# Altium PCB barun module.pcbdoc
Units mil, origin at the board's own origin, x right, y up, seen from the top; angles counter-clockwise.
Board outline 3000 x 2000 mil, 2 copper layers (Top Layer, Bottom Layer); 29 components, 41 nets, 142 pads, 109 vias.
Unrouted connection lines stored in the file: 5.
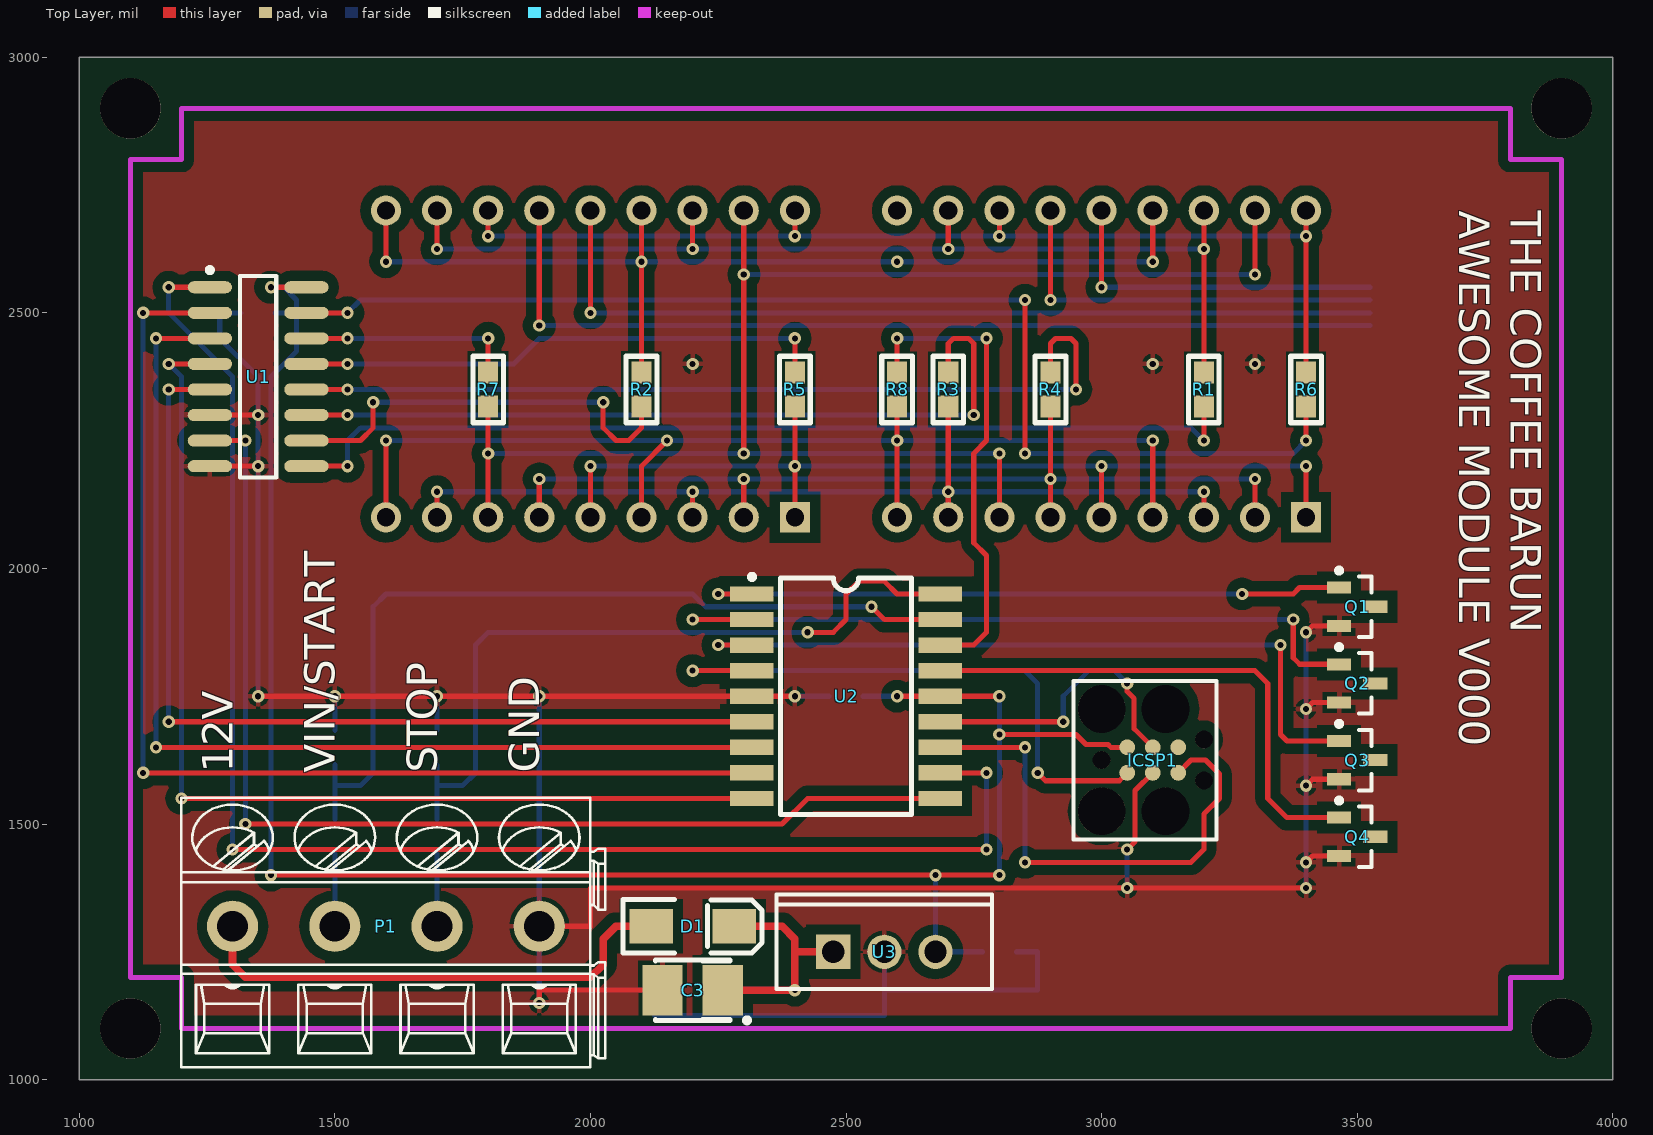
[diagram p0: Top Layer view]
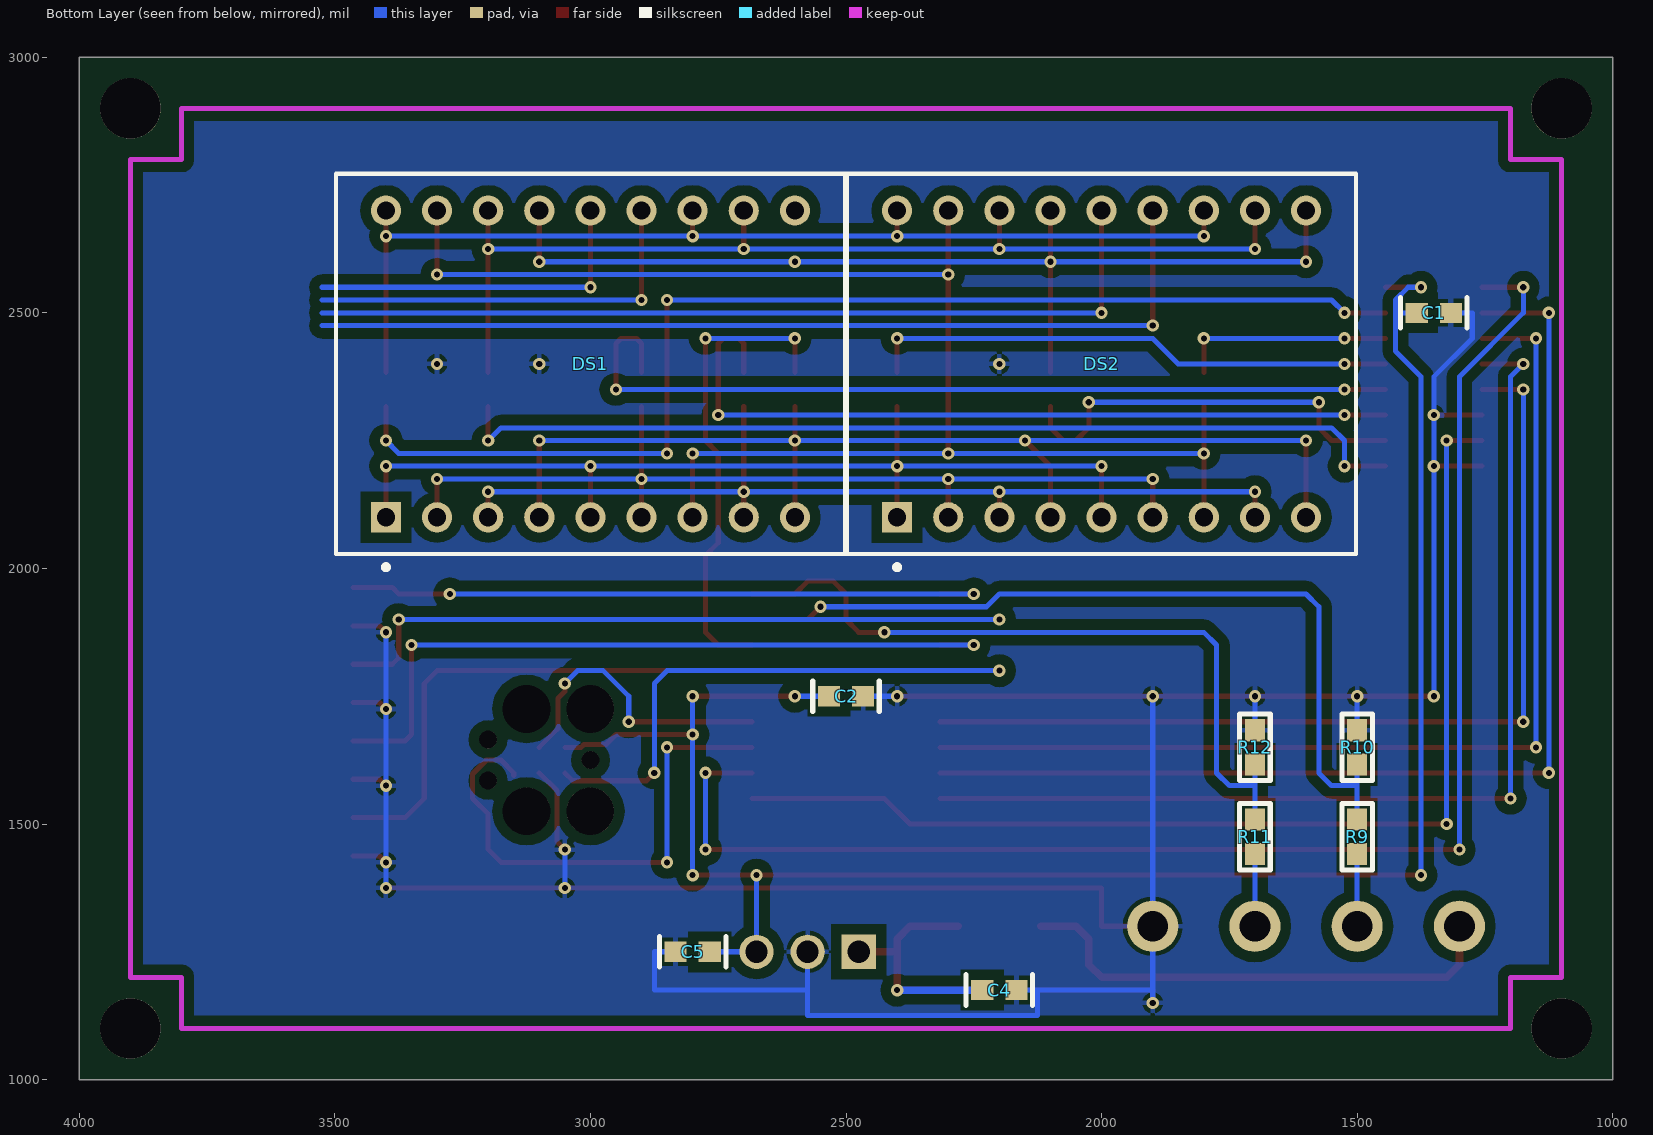
[diagram p1: Bottom Layer view, seen from below]

## Layer stack, top to bottom
Top Layer: signal copper 1.4
Dielectric: dielectric 12.6, FR-4, Dk 4.8
Bottom Layer: signal copper 1.4

## Board outline
1000,1000 1000,3000 4000,3000 4000,1000

## Design rules (kind name [scope] priority, off if disabled: settings)
Clearance Poly_GND [inPolygon vs not innet (gnd)] p1: gap=20
Clearance [All] p2: gap=8
PolygonConnect [All] p1: connectstyle=Relief reliefconductorwidth=10 reliefentries=4 polygonreliefangle="90 Angle"
RoutingVias [All] p1: holewidth=28 width=50 viastyle="Through Hole" minholewidth=12 minwidth=24 maxholewidth=28 maxwidth=50
SilkscreenOverComponentPads [All] p1: minsilkscreentomaskgap=10
SolderMaskExpansion [All] p1: expansion=4
Width [All] p1: maxlimit=150 minlimit=8 preferedwidth=10
27 further rules are at their usual default settings.

## Classes and differential pairs
component class "Barun Module": P1 R9 R10 R11 R12 U?
component class U_PIC16F627: C2 ICSP1 U2
component class U_PSU: C3 C4 C5 D1 U3
component class "U_7 Segment Display": C1 DS1 DS2 Q1 Q2 Q3 Q4 R1 R2 R3 R4 R5 R6 R7 R8 U1

## Components (designator, comment, footprint, x,y, rotation, side; value= is the part's Value field where it differs from the comment)
C1 "100nF" "CAP (3D) - 0603" 1350,2500 r0 bottom
C2 "Cap" "CAP (3D) - 0603" 2500,1750 r180 bottom
C3 "10uF" "TAG B CASE" 2200,1175 r180 top
C4 "100nF" "CAP (3D) - 0603" 2200,1175 r0 bottom
C5 "100nF" "CAP (3D) - 0603" 2800,1250 r180 bottom
D1 "S1M" DO-214AC 2200,1300 r0 top
DS1 "DC56-51PBWA/A" "K-18 (3D)" 3000,2400 r180 bottom
DS2 "DC56-51PBWA/A" "K-18 (3D)" 2000,2400 r180 bottom
ICSP1 "TAG CONNECT" "ICSP - TAG CONNECT" 3000,1625 r0 top
P1 "Header 4" "4 x 5.08mm" 1600,1300 r0 top
Q1 "MMUN2211LT1" SOT23-3L 3500,1925 r0 top
Q2 "MMUN2211LT1" SOT23-3L 3500,1775 r0 top
Q3 "MMUN2211LT1" SOT23-3L 3500,1625 r0 top
Q4 "MMUN2211LT1" SOT23-3L 3500,1475 r0 top
R1 "1k" "RES (3D) - 0603" 3200,2350 r270 top
R2 "1k" "RES (3D) - 0603" 2100,2350 r270 top
R3 "1k" "RES (3D) - 0603" 2700,2350 r90 top
R4 "1k" "RES (3D) - 0603" 2900,2350 r90 top
R5 "1k" "RES (3D) - 0603" 2400,2350 r90 top
R6 "1k" "RES (3D) - 0603" 3400,2350 r270 top
R7 "1k" "RES (3D) - 0603" 1800,2350 r90 top
R8 "1k" "RES (3D) - 0603" 2600,2350 r90 top
R9 "10k" "RES (3D) - 0603" 1500,1475 r270 bottom
R10 "10k" "RES (3D) - 0603" 1500,1650 r90 bottom
R11 "10k" "RES (3D) - 0603" 1700,1475 r270 bottom
R12 "10k" "RES (3D) - 0603" 1700,1650 r90 bottom
U1 "MC14543BD" 751B-05_N 1350,2375 r0 top
U2 "PIC16F627-04I/P" SOIC-18 2500,1750 r270 top
U3 "LM7805ACT" TO-220 2575,1250 r0 top

## Footprints (in the part's own frame and the unit in brackets; to place one, negate y for a bottom-side part, rotate by r counter-clockwise, add the part's x,y. Pads: shape width x height; smd on the part's side, far side on the other; paste and mask are expansions set on the pad)
"4 x 5.08mm" [mil] "Phoenix Contact 1733596"
  round 100 hole 60: 1(-300,0) 2(-100,0) 3(100,0) 4(300,0)
  silkscreen extent -400,-276 429,252, body extent -400,-276 429,252, height 602
751B-05_N [mm] "SOIC, 16-Leads, Body 9.9x3.9mm, Pitch 1.27mm, IPC Medium Density"
  oval 2.2x0.6 smd: 1(-2.4,4.445) 2(-2.4,3.175) 3(-2.4,1.905) 4(-2.4,0.635) 5(-2.4,-0.635) 6(-2.4,-1.905) 7(-2.4,-3.175) 8(-2.4,-4.445) 9(2.4,-4.445) 10(2.4,-3.175) 11(2.4,-1.905) 12(2.4,-0.635) 13(2.4,0.635) 14(2.4,1.905) 15(2.4,3.175) 16(2.4,4.445)
  silkscreen extent -2.52,-5 0.9,5.42, body extent -1.95,-4.95 1.95,4.95, height 1.75
"CAP (3D) - 0603" [mm]
  rect 1.1x1 smd: 1(0.85,0) 2(-0.85,0)
  silkscreen extent -1.65,-0.76 1.65,0.76, body extent -0.8,-0.4 0.8,0.4, height 0.92
DO-214AC [mil]
  rect 85x67 smd: 1(-81,0) 2(81,0)
  silkscreen extent -136,-52 136,52, body extent -79,-39 79,39, height 61
"ICSP - TAG CONNECT" [mil] "ICSP - TAG CONNECT"
  round 31 smd paste-40: 1(50,-25) 2(50,25) 3(100,-25) 4(100,25) 5(150,-25) 6(150,25)
  round 34 hole 35 unplated: A(0,0) B(200,40) C(200,-40)
  round 92 hole 93 unplated: D(0,-100) E(125,-100) F(0,100) G(125,100)
  silkscreen extent -55,-155 225,155
"K-18 (3D)" [mm] "LED, 7-Segment Display, 14.22 mm, Dual Digit; 18 Leads; Row Space 15.24 mm; Pitch 2.54 mm"
  rect 1.5x1.5 hole 0.9: 1(-10.16,-7.62)
  round 1.5 hole 0.9: 2(-7.62,-7.62) 3(-5.08,-7.62) 4(-2.54,-7.62) 5(0,-7.62) 6(2.54,-7.62) 7(5.08,-7.62) 8(7.62,-7.62) 9(10.16,-7.62) 10(10.16,7.62) 11(7.62,7.62) 12(5.08,7.62) 13(2.54,7.62) 14(0,7.62) 15(-2.54,7.62) 16(-5.08,7.62) 17(-7.62,7.62) 18(-10.16,7.62)
  silkscreen extent -12.65,-10.22 12.65,9.45, body extent -12.65,-9.45 12.65,9.45, height 8
"RES (3D) - 0603" [mm]
  rect 1.1x1 smd: 1(0.85,0) 2(-0.85,0)
  silkscreen extent -1.65,-0.76 1.65,0.76, body extent -0.8,-0.4 0.8,0.4, height 0.92
SOIC-18 [mil]
  rect 30x85 smd: 1(-200,-184.05) 2(-150,-184.05) 3(-100,-184.05) 4(-50,-184.05) 5(0,-184.05) 6(50,-184.05) 7(100,-184.05) 8(150,-184.05) 9(200,-184.05) 10(200,184.06) 11(150,184.06) 12(100,184.06) 13(50,184.06) 14(0,184.06) 15(-50,184.06) 16(-100,184.06) 17(-150,184.06) 18(-200,184.06)
  silkscreen extent -238,-189 231,128, body extent -236,-148 236,148, height 100
SOT23-3L [mm] "SOT23, 3-Leads, Body 2.9x1.3mm, Pitch 0.95mm, Lead Span 2.5mm, IPC High Density"
  rect 1.2x0.6 smd: 1(-0.9,0.95) 2(-0.9,-0.95) 3(0.9,0)
  silkscreen extent -1.02,-1.5 0.7,1.92, body extent -0.7,-1.5 0.7,1.5, height 1.1
"TAG B CASE" [mm]
  rect 2x2.5 smd: 1(-1.5,0) 2(1.5,0)
  silkscreen extent -2.83,-1.5 1.85,1.62, body extent -1.8,-1.4 1.8,1.4, height 1.95
TO-220 [mm] "TO-220"
  rect 1.7x1.7 hole 1.1: 1(-2.54,0)
  round 1.7 hole 1.1: 2(0,0) 3(2.54,0)
  silkscreen extent -5.35,-1.85 5.35,2.85, body extent -5.35,-2.15 5.35,2.85, height 20.6

## Part data
C1: library part "CAP SMD 0603 100nF", "CAPACITOR SMD 0603"
C2: "Capacitor"
C3: library part "Cap Pol", "CAPACITOR POLARISED TAG B CASE"
C4 C5: library part CAP, "CAPACITOR SMD 0603"
D1: library part DIODE, "DIODE, POWER"
DS1 DS2: library part HDSP-521A, "14.22 mm 2-Digit General Purpose Blue 7-Segment Display"
ICSP1: library part "ICSP - TAG CONNECT"
P1: "Header, 4-Pin"
Q1 Q2 Q3 Q4: library part "NPN DIGITAL TRANSISTOR"
R1 R2 R3 R4 R5 R6 R7 R8: library part "RES SMD 0603 1k", "RESISTOR SMD 0603 1k"
R9 R10 R11 R12: library part "RES SMD 0603 10k", "RESISTOR SMD 0603 10k"
U1: "BCD-to-7-Segment Latch/Decoder/Driver for Liquid Crystals"
U2: "FLASH-Based 8-Bit CMOS Microcontroller, 1K (x14-Bit words) FLASH, 224 Bytes RAM, 4 MHz, 18-Pin PDIP, 3.0 to 5.5V Supply Range, Industrial Temperature"
U3: library part MC7805ACT, "3-Terminal Positive Fixed Voltage Regulator"

## Free pads (board coordinates)
  round 118.11 hole 118.11: 0(1100,1100) 0(1100,2900) 0(3900,1100) 0(3900,2900)

## Via types
v1: diameter 24, hole 12, Top Layer to Bottom Layer, 109 vias

## Nets (pads, with @x,y where several pads share a name; then routed paths per layer and width w, separated by ;. In a path a pad name is that pad's centre, name@x,y a point inside that pad or via, vN(x,y) a via of type N, cw(c..) or ccw(c..) an arc to the next point about the centre after c; other vN are vias at no path point)
12V: C3.1 C4.1 D1.2 U3.1 | length 611.8
  Top Layer w15: C3.1 v1(2400,1175) 2400,1250 ; D1.2 2375,1300 2400,1275 2400,1250 ; U3.1 2400,1250
  Bottom Layer w15: C4.1 v1(2400,1175)
A: DS1.11 DS1.16 DS2.11 DS2.16 R1.2 | length 2041.5
  Top Layer w10: v1(1700,2625) DS2.11 ; v1(2200,2625) DS2.16 ; v1(2700,2625) DS1.11 ; R1.2 v1(3200,2625) DS1.16
  Bottom Layer w10: v1(1700,2625) v1(2200,2625) v1(2700,2625) v1(3200,2625)
A1: DS1.14 Q1.3 | length 675
  Top Layer w10: v1(3000,2550) DS1.14
  Bottom Layer w10: v1(3000,2550) 3525,2550
A2: DS1.13 Q2.3 | length 800
  Top Layer w10: v1(2900,2525) DS1.13
  Bottom Layer w10: v1(2900,2525) 3525,2525
A3: DS2.14 Q3.3 | length 1725
  Top Layer w10: v1(2000,2500) DS2.14
  Bottom Layer w10: v1(2000,2500) 3525,2500
A4: DS2.13 Q4.3 | length 1850
  Top Layer w10: v1(1900,2475) DS2.13
  Bottom Layer w10: v1(1900,2475) 3525,2475
B: DS1.10 DS1.15 DS2.10 DS2.15 R2.2 | length 2016.5
  Top Layer w10: v1(1600,2600) DS2.10 ; R2.2 v1(2100,2600) DS2.15 ; v1(3100,2600) DS1.15
  Bottom Layer w10: v1(1600,2600) v1(2100,2600) v1(2600,2600) v1(3100,2600)
BCD_A: U1.5 U2.6 | length 1871.5
  Top Layer w10: v1(1175,1700) U2.6 ; v1(1175,2350) U1.5
  Bottom Layer w10: v1(1175,1700) v1(1175,2350)
BCD_B: U1.3 U2.7 | length 2071.5
  Top Layer w10: v1(1150,1650) U2.7 ; v1(1150,2450) U1.3
  Bottom Layer w10: v1(1150,1650) v1(1150,2450)
BCD_C: U1.2 U2.8 | length 2221.5
  Top Layer w10: v1(1125,1600) U2.8 ; v1(1125,2500) U1.2
  Bottom Layer w10: v1(1125,1600) v1(1125,2500)
BCD_D: U1.4 U2.9 | length 2056.8
  Top Layer w10: v1(1175,2400) U1.4 ; v1(1200,1550) U2.9
  Bottom Layer w10: v1(1175,2400) 1200,2375 v1(1200,1550)
BI: U1.7 U2.10 | length 2199.3
  Top Layer w10: U1.7 v1(1325,2250) ; v1(1325,1500) 2375,1500 2425,1550 U2.10
  Bottom Layer w10: v1(1325,1500) v1(1325,2250)
"BUTTON 1": P1.2 R9.1 | length 141.5
  Bottom Layer w10: P1.2 R9.1
"BUTTON 2": P1.3 R11.1 | length 141.5
  Bottom Layer w10: P1.3 R11.1
C: DS1.3 DS1.8 DS2.3 DS2.8 R3.2 | length 1866.5
  Top Layer w10: DS2.8 v1(1700,2150) ; DS2.3 v1(2200,2150) ; DS1.8 v1(2700,2150) R3.2 ; DS1.3 v1(3200,2150)
  Bottom Layer w10: v1(1700,2150) v1(2200,2150) v1(2700,2150) v1(3200,2150)
D: DS1.2 DS1.6 DS2.2 DS2.6 R4.2 | length 1841.5
  Top Layer w10: DS2.6 v1(1900,2175) ; DS2.2 v1(2300,2175) ; DS1.6 v1(2900,2175) R4.2 ; DS1.2 v1(3300,2175)
  Bottom Layer w10: v1(1900,2175) v1(2300,2175) v1(2900,2175) v1(3300,2175)
DP: DS1.4 DS1.9 DS2.4 DS2.9 R8.2 | length 2187.2
  Top Layer w10: DS2.9 v1(1600,2250) ; DS2.4 2100,2200 v1(2150,2250) ; DS1.9 v1(2600,2250) R8.2 ; DS1.4 v1(3100,2250)
  Bottom Layer w10: v1(1600,2250) v1(2150,2250) v1(2600,2250) v1(3100,2250)
E: DS1.1 DS1.5 DS2.1 DS2.5 R5.2 | length 1916.5
  Top Layer w10: DS2.5 v1(2000,2200) ; DS2.1 v1(2400,2200) R5.2 ; DS1.5 v1(3000,2200) ; DS1.1 v1(3400,2200)
  Bottom Layer w10: v1(2000,2200) v1(2400,2200) v1(3000,2200) v1(3400,2200)
F: DS1.12 DS1.18 DS2.12 DS2.18 R6.2 | length 2066.5
  Top Layer w10: v1(1800,2650) DS2.12 ; v1(2400,2650) DS2.18 ; v1(2800,2650) DS1.12 ; R6.2 v1(3400,2650) DS1.18
  Bottom Layer w10: v1(1800,2650) v1(2400,2650) v1(2800,2650) v1(3400,2650)
G: DS1.7 DS1.17 DS2.7 DS2.17 R7.2 | length 2941.5
  Top Layer w10: DS2.7 v1(1800,2225) R7.2 ; v1(2300,2225) v1(2300,2575) DS2.17 ; DS1.7 v1(2800,2225) ; v1(3300,2575) DS1.17
  Bottom Layer w10: v1(1800,2225) v1(2300,2225) v1(2800,2225) ; v1(2300,2575) v1(3300,2575)
GND: C1.2 C2.1 C3.2 C4.2 C5.2 ICSP1.3 P1.4 Q1.2 Q2.2 Q3.2 Q4.2 R10.1 R12.1 U1.6 U1.8 U2.5 U3.2 | length 7035.1
  Top Layer w10: U1.8 v1(1350,2200) ; U1.6 v1(1350,2300) ; v1(1350,1750) v1(1500,1750) v1(1700,1750) v1(1900,1750) U2.5 v1(2400,1750) ; v1(1900,1150) 1900,1175 C3.2 ; P1.4 2000,1300 2000,1375 v1(3050,1375) v1(3400,1375) ; v1(3050,1450) 3065.5,1465.5 3065.5,1565.5 ICSP1.3 ; v1(3400,1425) 3412.6,1437.6 Q4.2 ; v1(3400,1575) 3412.6,1587.6 Q3.2 ; v1(3400,1725) 3412.6,1737.6 Q2.2 ; v1(3400,1875) 3412.6,1887.6 Q1.2
  Bottom Layer w10: C1.2 1275,2500 1275,2450 1350,2375 v1(1350,2300) v1(1350,2200) v1(1350,1750) ; R10.1 v1(1500,1750) ; R12.1 v1(1700,1750) ; v1(1900,1150) 1900,1175 ; v1(1900,1750) P1.4 1900,1175 ; C4.2 2125,1175 ; v1(2400,1750) C2.1 ; U3.2 2575,1175 ; C5.2 2875,1250 2875,1175 2575,1175 ; v1(3050,1375) v1(3050,1450) ; v1(3400,1375) v1(3400,1425) v1(3400,1575) v1(3400,1725) v1(3400,1875) ; 1900,1175 2125,1175 ; 2125,1175 2125,1125 2575,1125 2575,1175
  other v1: 2200,2400 3100,2400 3300,2400
ICSP_PGCLCK: ICSP1.5 U2.12 | length 1019.3
  Top Layer w10: U2.12 v1(2850,1650) ; v1(2850,1425) 3175,1425 3200,1450 3200,1519.5 3230.5,1550 3230.5,1597.63 3203.13,1625 3175,1625 ICSP1.5 ICSP1.5@3150,1594.5
  Bottom Layer w10: v1(2850,1425) v1(2850,1650)
ICSP_PGDATA: ICSP1.4 U2.13 | length 592.7
  Top Layer w10: U2.13 v1(2925,1700) ; v1(3050,1775) 3050,1759.15 3063.72,1745.43 3063.72,1686.28 ICSP1.4
  Bottom Layer w10: v1(2925,1700) 2925,1750 2975,1800 3025,1800 v1(3050,1775)
ICSP_VPP: ICSP1.1 U2.4 | length 1164.1
  Top Layer w10: v1(2200,1800) U2.4 ; v1(2875,1600) 2890.5,1584.5 3034.5,1584.5 ICSP1.1
  Bottom Layer w10: v1(2200,1800) 2850,1800 2875,1775 v1(2875,1600)
LD: U1.1 U2.11 | length 2948.2
  Top Layer w10: v1(1175,2550) U1.1 ; v1(1300,1450) v1(2775,1450) ; U2.11 v1(2775,1600)
  Bottom Layer w10: v1(1175,2550) 1175,2500 1300,2375 v1(1300,1450) ; v1(2775,1450) v1(2775,1600)
NetQ1_1: Q1.1 U2.1 | length 1285.6
  Top Layer w10: v1(2250,1950) U2.1 ; v1(3275,1950) 3375,1950 3387.4,1962.4 Q1.1
  Bottom Layer w10: v1(2250,1950) v1(3275,1950)
NetQ2_1: Q2.1 U2.2 | length 1485.7
  Top Layer w10: v1(2200,1900) U2.2 ; v1(3375,1900) 3375,1825 3387.6,1812.4 Q2.1
  Bottom Layer w10: v1(2200,1900) 3250,1900 ; 3275,1900 3250,1900 ; v1(3375,1900) 3250,1900
NetQ3_1: Q3.1 U2.3 | length 1485.7
  Top Layer w10: v1(2250,1850) U2.3 ; v1(3350,1850) 3350,1675 3362.6,1662.4 Q3.1
  Bottom Layer w10: v1(2250,1850) 3250,1850 ; 3275,1850 3250,1850 ; v1(3350,1850) 3250,1850
NetQ4_1: Q4.1 U2.15 | length 1031.4
  Top Layer w10: U2.15 3300,1800 3325,1775 3325,1550 3362.6,1512.4 Q4.1
NetR1_1: R1.1 U1.9 | length 1892.8
  Top Layer w10: U1.9 v1(1525,2200) ; v1(3200,2250) R1.1
  Bottom Layer w10: v1(1525,2200) 1525,2250 1550,2275 3175,2275 v1(3200,2250)
NetR2_1: R2.1 U1.10 | length 828.1
  Top Layer w10: U1.10 1550,2250 1575,2275 v1(1575,2325) ; v1(2025,2325) 2025,2275 2050,2250 2075,2250 2100,2275 R2.1
  Bottom Layer w10: v1(1575,2325) v1(2025,2325)
NetR3_1: R3.1 U1.11 | length 1560.3
  Top Layer w10: U1.11 v1(1525,2300) ; R3.1 2700,2440 2710,2450 2740,2450 2750,2440 v1(2750,2300)
  Bottom Layer w10: v1(1525,2300) v1(2750,2300)
NetR4_1: R4.1 U1.12 | length 1710.3
  Top Layer w10: U1.12 v1(1525,2350) ; R4.1 2900,2440 2910,2450 2940,2450 2950,2440 v1(2950,2350)
  Bottom Layer w10: v1(1525,2350) v1(2950,2350)
NetR5_1: R5.1 U1.13 | length 1042.8
  Top Layer w10: U1.13 v1(1525,2400) ; R5.1 v1(2400,2450)
  Bottom Layer w10: v1(1525,2400) 1850,2400 1900,2450 v1(2400,2450)
NetR6_1: R6.1 U1.15 | length 2342.8
  Top Layer w10: U1.15 v1(1525,2500) ; v1(2850,2225) v1(2850,2525) ; v1(3400,2250) R6.1
  Bottom Layer w10: v1(1525,2500) 1550,2525 v1(2850,2525) ; v1(2850,2225) 3375,2225 v1(3400,2250)
NetR7_1: R7.1 U1.14 | length 422
  Top Layer w10: U1.14 v1(1525,2450) ; R7.1 v1(1800,2450)
  Bottom Layer w10: v1(1525,2450) v1(1800,2450)
NetR8_1: R8.1 U2.16 | length 938.5
  Top Layer w10: R8.1 v1(2600,2450) ; U2.16 2750,1850 2775,1875 2775,2025 2750,2050 2750,2225 2775,2250 v1(2775,2450)
  Bottom Layer w10: v1(2600,2450) v1(2775,2450)
"START (VIN)": R9.2 R10.2 U2.17 | length 1658.5
  Top Layer w10: v1(2550,1925) 2575,1900 U2.17
  Bottom Layer w10: R9.2 1500,1575 ; R10.2 1500,1575 ; v1(2550,1925) 2225,1925 2200,1950 1600,1950 1575,1925 1575,1600 1550,1575 1500,1575
STOP: R11.2 R12.2 U2.18 | length 1443.9
  Top Layer w10: v1(2425,1875) 2475,1875 2500,1900 2500,1950 2525,1975 2575,1975 2600,1950 U2.18
  Bottom Layer w10: R11.2 1700,1575 ; R12.2 1700,1575 ; v1(2425,1875) 1800,1875 1775,1850 1775,1600 1750,1575 1700,1575
VCC: C1.1 C2.2 C5.1 ICSP1.2 U1.16 U2.14 U3.3 | length 3860.5
  Top Layer w10: v1(1375,1400) v1(2675,1400) v1(2800,1400) ; v1(1375,2550) U1.16 ; v1(2600,1750) U2.14 v1(2800,1750) ; v1(2800,1675) 2950,1675 2969.5,1655.5 3012.63,1655.5 3018.13,1650 ICSP1.2
  Bottom Layer w10: v1(1375,1400) 1375,2375 1425,2425 1425,2500 ; v1(1375,2550) 1400,2550 1425,2525 1425,2500 ; C1.1 1425,2500 ; C2.2 v1(2600,1750) ; v1(2675,1400) U3.3 C5.1 ; v1(2800,1400) v1(2800,1675) v1(2800,1750)
VIN: D1.1 P1.1 | length 975.1
  Top Layer w15: P1.1 1300,1225 1325,1200 2000,1200 2025,1225 2025,1275 2050,1300 D1.1
pads on no net: ICSP1.6 ICSP1.A ICSP1.B ICSP1.C ICSP1.D ICSP1.E ICSP1.F ICSP1.G

## Polygon pours and split planes (outlines as drawn)
GND on Bottom Layer "GND" (solid, remove dead copper, pour order 2): 1000,3000 4000,3000 4000,1000 1000,1000 1000,3000
GND on Top Layer "GND" (solid, remove dead copper, pour order 4): 1000,3000 4000,3000 4000,1000 1000,1000 1000,3000

## Keep-outs
Keep-Out Layer:
  lines w10: 1100,1200 1200,1200 1200,1100 3800,1100 3800,1200 3900,1200 3900,2800 3800,2800 3800,2900 1200,2900 1200,2800 1100,2800 1100,1200

## Silkscreen, mask and mechanical layers (free items; w line width, h text height)
Top Overlay:
  text "AWESOME MODULE V000" at 3700,2700 h60 r270
  text "THE COFFEE BARUN" at 3800,2700 h60 r270
  text "12V" at 1300,1600 h60 r90
  text "VIN/START" at 1500,1600 h60 r90
  text "STOP" at 1700,1600 h60 r90
  text "GND" at 1900,1600 h60 r90
Mechanical 1:
  the board outline again, w10